# Altium PCB PCB1.PcbDoc
Units mil, origin at the board's own origin, x right, y up, seen from the top; angles counter-clockwise.
Board outline 2475 x 1980 mil, 2 copper layers (Top Layer, Bottom Layer); 17 components, 10 nets, 38 pads, 0 vias.
Unrouted connection lines stored in the file: 1.
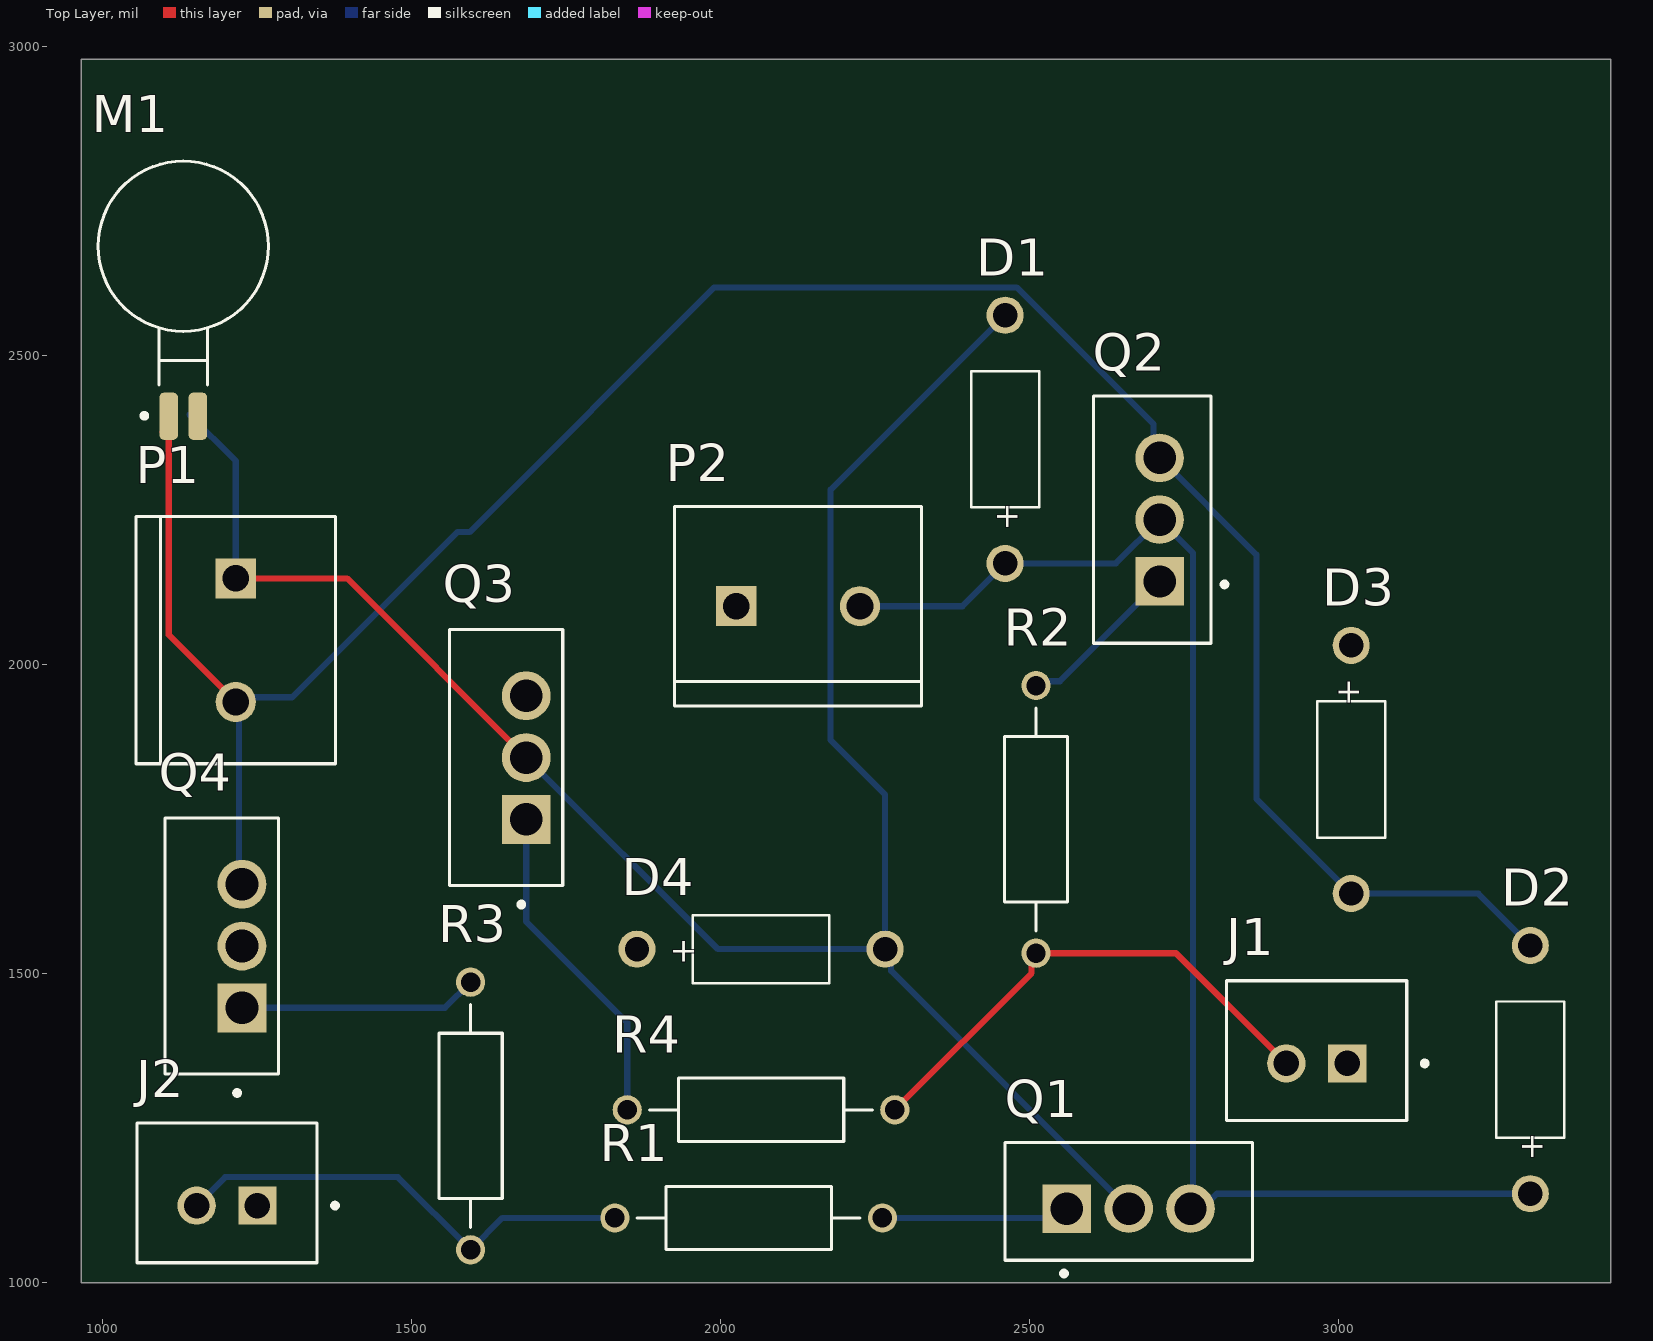
[diagram p0: Top Layer view]
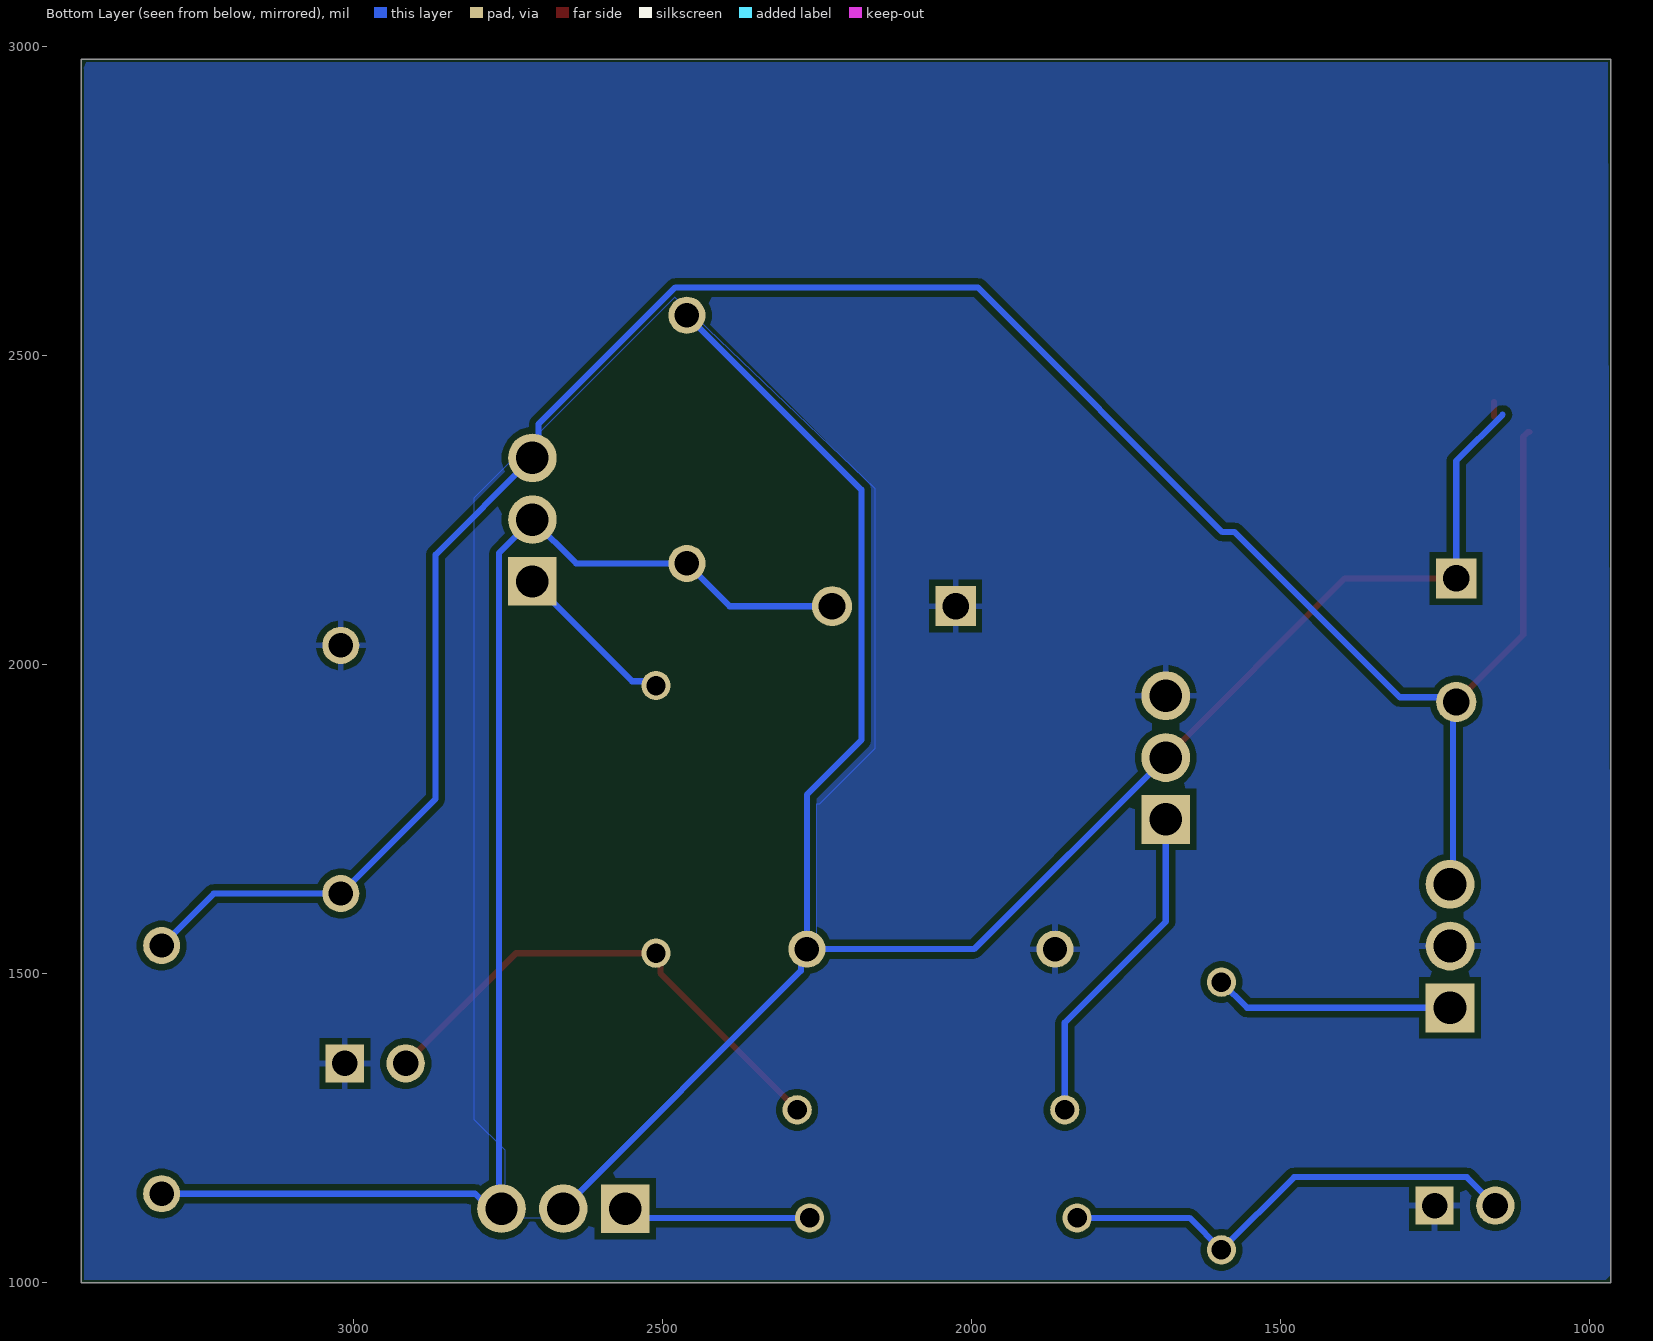
[diagram p1: Bottom Layer view, seen from below]
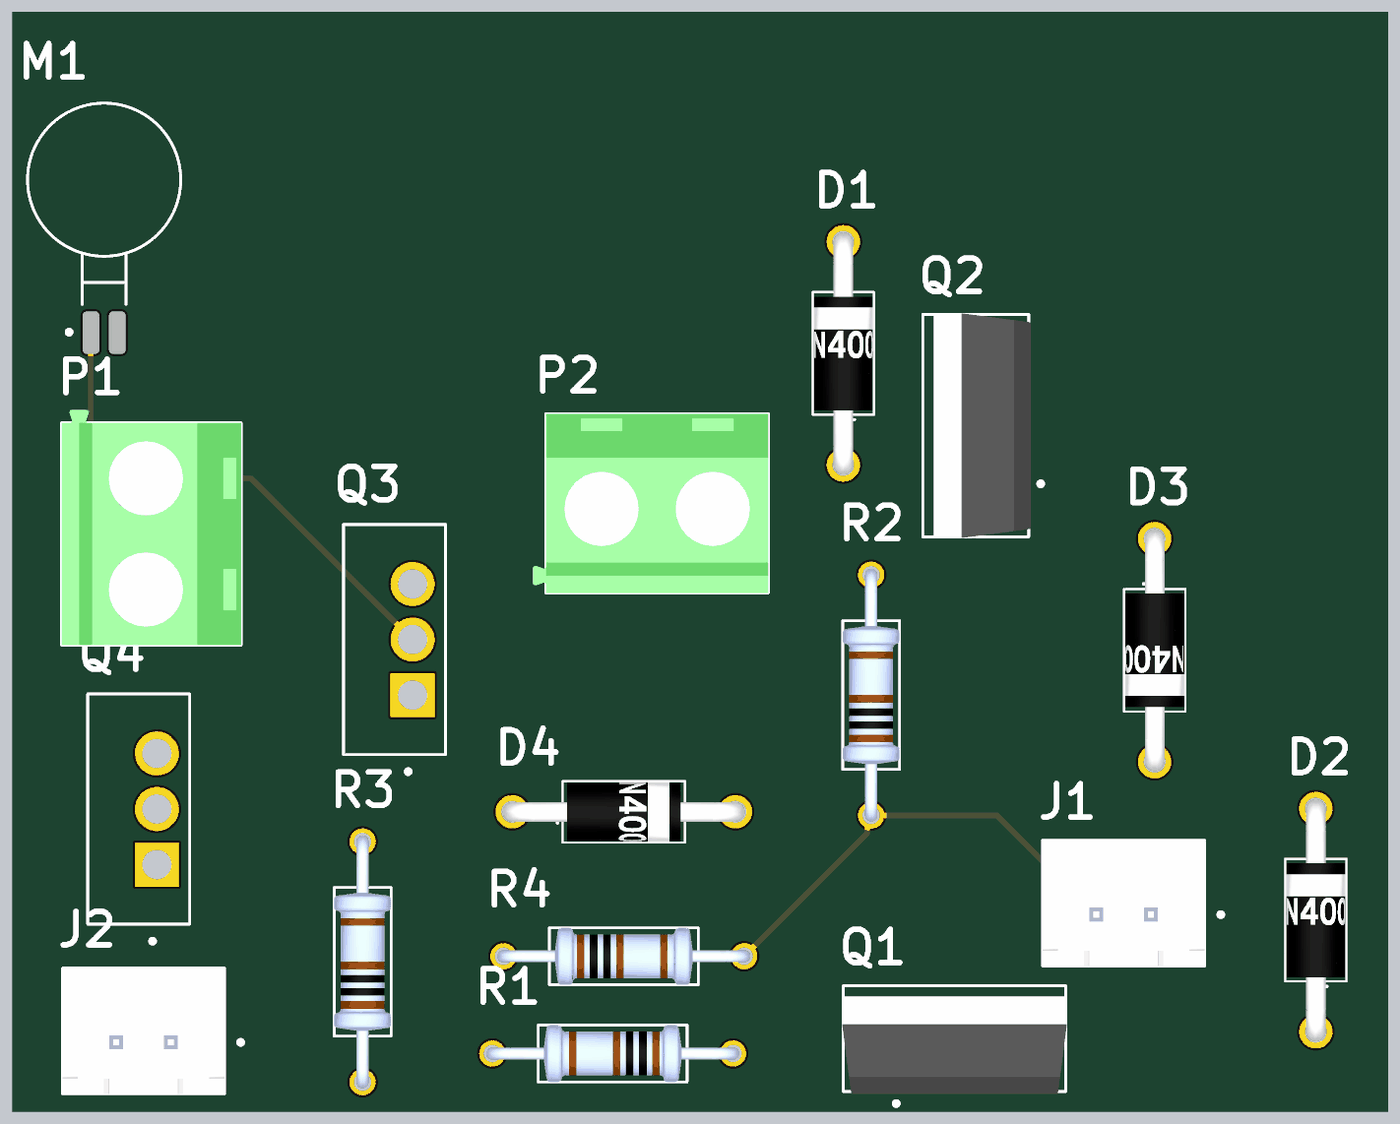
[diagram p2: 3D render of the assembled board from above, using the file's embedded part models]

## Layer stack, top to bottom
Top Solder: solder mask 0.4, Solder Resist, Dk 3.5
Top Layer: signal copper 1.4
Dielectric 1: dielectric 12.6, FR-4, Dk 4.8
Bottom Layer: signal copper 1.4
Bottom Solder: solder mask 0.4, Solder Resist, Dk 3.5

## Board outline
965,1000 3440,1000 3440,2980 965,2980

## Design rules (kind name [scope] priority, off if disabled: settings)
Clearance [All] p1: gap=10 ignorepadtopadclearanceinfootprint=FALSE
PolygonConnect [All] p1: connectstyle=Relief reliefconductorwidth=10 reliefentries=4 polygonreliefangle="90 Angle" airgapwidth=10
RoutingVias [All] p1: holewidth=28 width=50 viastyle="Through Hole" minholewidth=28 minwidth=50 maxholewidth=28 maxwidth=50
SolderMaskExpansion [All] p1: expansion=4 istentingtop=FALSE
Width [All] p1: maxlimit=10 minlimit=10 preferedwidth=10
30 further rules are at their usual default settings.

## Components (designator, comment, footprint, x,y, rotation, side; value= is the part's Value field where it differs from the comment)
D1 "Diodo 1N4007" "Diodo 1N4007" 2460,2365 r90 top
D2 "Diodo 1N4007" "Diodo 1N4007" 3310,1345 r90 top
D3 "Diodo 1N4007" "Diodo 1N4007" 3020,1830.79 r270 top
D4 "Diodo 1N4007" "Diodo 1N4007" 2065,1540 r0 top
J1 "B2B-XH-A(LF)(SN)" JST_B2B-XH-A(LF)(SN) 2964.21,1375.67 r0 top
J2 "B2B-XH-A(LF)(SN)" JST_B2B-XH-A(LF)(SN) 1200.79,1145.67 r0 top
M1 "C0720B001F" XDCR_C0720B001F 1130,2600 r0 top
P1 "282837-2" TE_282837-2 1215,2040 r270 top
P2 "282837-2" TE_282837-2 2125,2095 r0 top
Q1 "mos nch" "mos nch" 2660,1120 r0 top
Q2 "mos nch" "mos nch" 2710,2235 r90 top
Q3 "mos pch" "mos pch" 1685,1750 r90 top
Q4 "mos pch" "mos pch" 1225,1445 r90 top
R1 "MFR-25FBF52-10K" RESAD1100W55L680D260 2045,1105 r180 top
R2 "MFR-25FBF52-10K" RESAD1100W55L680D260 2510,1750 r90 top
R3 "MFR-25FBF52-10K" RESAD1100W55L680D260 1595,1270 r90 top
R4 "MFR-25FBF52-10K" RESAD1100W55L680D260 2065,1280 r0 top

## Footprints (in the part's own frame and the unit in brackets; to place one, negate y for a bottom-side part, rotate by r counter-clockwise, add the part's x,y. Pads: shape width x height; smd on the part's side, far side on the other; paste and mask are expansions set on the pad)
"Diodo 1N4007" [mil]
  round 60 hole 39.37: 1(-200.79,0) 2(200.79,0)
  silkscreen extent -110,-55 110,55, body extent -218,-53 218,53, height 83
JST_B2B-XH-A(LF)(SN) [mm]
  rect 1.575x1.575 / inner round 1.575 / far side rect 1.575x1.575 hole 1.05: 1(1.25,-0.525)
  round 1.575 hole 1.05: 2(-1.25,-0.525)
  silkscreen extent -3.7,-2.88 4.54,2.88, body extent -3.7,-2.88 3.7,2.88, height 7
"mos nch" [mm]
  rect 1.995x1.995 hole 1.33: 1(-2.54,0)
  round 1.995 hole 1.33: 2(0,0) 3(2.54,0)
  silkscreen extent -5.08,-2.77 5.08,2.72, body extent -5.14,-2.22 5.14,2.23, height 19.06
"mos pch" [mm]
  rect 2.01x2.01 hole 1.34: 1(0,0)
  round 2.01 hole 1.34: 2(2.54,0) 3(5.08,0)
  silkscreen extent -3.6,-1.5 7.8,3.16
RESAD1100W55L680D260 [mm]
  round 1.2 hole 0.8: 1(-5.5,0) 2(5.5,0)
  silkscreen extent -4.58,-1.3 4.58,1.3, body extent -5.77,-1.3 5.77,1.3, height 2.6
TE_282837-2 [mm]
  rect 1.65x1.65 / inner round 1.65 / far side rect 1.65x1.65 hole 1.1: 1(-2.54,0)
  round 1.65 hole 1.1: 2(2.54,0)
  silkscreen extent -5.08,-4.1 5.08,4.1, body extent -5.68,-4.1 5.08,4.1, height 10
XDCR_C0720B001F [mm]
  rrect50% 0.76x1.94 smd: 1(-0.6,-5.02) 2(0.6,-5.02)
  silkscreen extent -3.5,-5.1 3.5,5.47

## Part data
J1 J2: "Connector Header Through Hole 2 position 0.098 (2.50mm)", Package=None, Check_prices=https://www.snapeda.com/parts/B2B-XH-A(LF)(SN)/JST+Sales+America+Inc./view-part/?ref=eda, MF="JST Sales America Inc.", MP=B2B-XH-A(LF)(SN), SnapEDA_Link=https://www.snapeda.com/parts/B2B-XH-A(LF)(SN)/JST+Sales+America+Inc./view-part/?ref=snap
M1: "DC Motor Vibration, ERM 10000 RPM 3VDC", Package="Jinlong Machinery", Availability=Unavailable, MF="Jinlong Machinery", MP=C0720B001F, Price=None, SnapEDA_Link=https://www.snapeda.com/parts/C0720B001F/Jinlong%20Machinery%20%26%20Electronics%2C%20Inc./view-part/645169/?ref=snap
P1 P2: "Ð Ð°Ð·ÑŠÐµÐ¼Ð½Ñ‹Ðµ ÐºÐ»ÐµÐ¼Ð¼Ð½Ñ‹Ðµ ÐºÐ¾Ð»Ð¾Ð´ÐºÐ¸ Ð Ð¾Ð·ÐµÑ‚ÐºÐ° 2 Ð¿Ð¾Ð»Ð¾Ð¶ÐµÐ½Ð¸Ñ 5,08 Ð¼Ð¼ ÐŸÑ€Ð¸Ð¿Ð¾Ð¹ Ð¿Ñ€ÑÐ¼Ð¾Ð¹ Ñ‡ÐµÑ€ÐµÐ· Ð¾Ñ‚Ð²ÐµÑ€ÑÑ‚Ð¸Ðµ 13,5 Ð / ÐºÐ¾Ð½Ñ‚Ð°ÐºÑ‚", Package=None, Availability="In Stock", Check_prices=https://www.snapeda.com/parts/282837-2/TE+Connectivity+AMP+Connectors/view-part/?ref=eda, MF="TE Connectivity", MP=282837-2, Price=None, Purchase-URL=https://pricing.snapeda.com/search/part/282837-2/?ref=eda, SnapEDA_Link=https://www.snapeda.com/parts/282837-2/TE+Connectivity+AMP+Connectors/view-part/?ref=snap
Q1 Q2: "N-Channel 55 V 75A (Tc) 170W (Tc) Through Hole TO-220AB", Package="TO-220 Vishay", Availability="In Stock", Check_prices=https://www.snapeda.com/parts/IRF3205ZPBF/Infineon+Technologies/view-part/?ref=eda, MF="Infineon Technologies", MP=IRF3205ZPBF, Price=None, Purchase-URL=https://pricing.snapeda.com/search/part/IRF3205ZPBF/?ref=eda, SnapEDA_Link=https://www.snapeda.com/parts/IRF3205ZPBF/Infineon+Technologies/view-part/?ref=snap
Q3 Q4: "RoHS Compliant", Package="TO-220 Vishay", Arrow_Americas-Purchase-URL=https://snapeda.com/shop?store=Arrow+Americas&id=2766497, DigiKey-Purchase-URL=https://snapeda.com/shop?store=DigiKey&id=2766497, MF="Infineon Technologies", Mouser-Purchase-URL=https://snapeda.com/shop?store=Mouser&id=2766497, MP=IRF9540NPBF, SnapEDA_Link=https://www.snapeda.com/parts/IRF9540NPBF/Infineon%20Technologies/view-part/2766497/?ref=snap
R1 R2 R3 R4: "10.2 kOhms Â±1% 0.25W, 1/4W Through Hole Resistor Axial - Metal Film", Package="Axial Yageo", Availability="In Stock", Check_prices=https://www.snapeda.com/parts/MFR-25FBF52-10K/Yageo/view-part/?ref=eda, MF=Yageo, MP=MFR-25FBF52-10K, Price=None, Purchase-URL=https://pricing.snapeda.com/search/part/MFR-25FBF52-10K/?ref=eda, SnapEDA_Link=https://www.snapeda.com/parts/MFR-25FBF52-10K/Yageo/view-part/?ref=snap

## Nets (pads, with @x,y where several pads share a name; then routed paths per layer and width w, separated by ;. In a path a pad name is that pad's centre, name@x,y a point inside that pad or via, vN(x,y) a via of type N, cw(c..) or ccw(c..) an arc to the next point about the centre after c; other vN are vias at no path point)
+12: D1.1 D2.1 P2.2 Q1.3 Q2.2 | length 2242.3
  Bottom Layer w10: P2.2 2390.79,2095 D1.1 2639.21,2164.21 Q2.2 2764.27,2180.73 2764.27,1124.27 Q1.3 2778.55,1120 2802.76,1144.21 D2.1
GND: D3.1 D4.1 J1.1 J2.1 P2.1 Q3.3 Q4.2
"MCU signal 1": J1.2 R2.1 R4.2 | length 827
  Top Layer w10: R4.2 2502.87,1501.34 2502.87,1526.34 R2.1 2736.54,1533.46 J1.2
"MCU signal 2": J2.2 R1.2 R3.1 | length 766
  Bottom Layer w10: J2.2 1197.58,1171 1477.46,1171 R3.1 1646.54,1105 R1.2
NetQ1_1: Q1.1 R1.1 | length 325.9
  Top Layer w10: Q1.1@2545,1105 Q1.1
  Bottom Layer w10: R1.1 2545,1105 Q1.1
NetQ2_1: Q2.1 R2.2 | length 269.8
  Bottom Layer w10: R2.2 2517.09,1973.62 2548.62,1973.62 Q2.1
NetQ3_1: Q3.1 R4.1 | length 537.7
  Bottom Layer w10: Q3.1 1685,1584.49 1848.46,1421.02 R4.1
NetQ4_1: Q4.1 R3.2 | length 387.2
  Bottom Layer w10: Q4.1 1553.46,1445 R3.2
V+: D2.2 D3.2 M1.1 P1.2 Q2.3 Q4.3 | length 3857.7
  Top Layer w10: M1.1@1096.61,2376.65 1099.09,2376.65 1106.38,2369.36 1106.38,2048.62 P1.2
  Bottom Layer w10: Q4.3 1220,1650 1220,1935 P1.2 1222.48,1947.48 1306.15,1947.48 1573.67,2215 1593.28,2215 1989.07,2610.79 2478.64,2610.79 2700.16,2389.27 2700.16,2344.84 Q2.3 2866.77,2178.23 2866.77,1783.23 D3.2 3225.79,1630 D2.2
V-: D1.2 D4.2 M1.2 P1.1 Q1.2 Q3.2 | length 3380.9
  Top Layer w10: M1.2 M1.2@1153.62,2425.59 ; P1.1 1395,2140 Q3.2
  Bottom Layer w10: 1140,2405 1215,2330 P1.1 ; Q3.2@1685.35,1850 1995.35,1540 D4.2 ; D1.2 2177.52,2283.31 2177.52,1878.23 2265.79,1789.96 D4.2 ; Q1.2 2275.35,1504.65 2275.35,1530.43 D4.2

## Polygon pours and split planes (outlines as drawn)
GND on Bottom Layer "GND_L02_P001" (solid, remove dead copper, pour order 1): 2480,2595 2805,2270 2805,1265 2755,1215 2755,1105 2750,1100 2745,1105 2680,1105 2250,1535 2250,1775 2245,1775 2155,1865 2155,2285
GND on Bottom Layer "GND_L02_P000" (solid, remove dead copper, pour order 0): 970,2975 3445,2975 3435,2965 3435,1005 970,1005 965,1010

## Text inside footprints (layer, text, board x,y; h text height)
D1: Top Overlay "+" at 2480.34,2217.36 h39.37 r90
D2: Top Overlay "+" at 3330.34,1197.36 h39.37 r90
D3: Top Overlay "+" at 2999.66,1978.43 h39.37 r270
D4: Top Overlay "+" at 1917.36,1519.66 h39.37